# Altium PCB Arduino MEGA blank shield.pcbdoc
Units mil, origin at the board's own origin, x right, y up, seen from the top; angles counter-clockwise.
Board outline 3210 x 3300 mil, 2 copper layers (Top Layer, Bottom Layer); 29 components, 85 nets, 185 pads, 12 vias.
Unrouted connection lines stored in the file: 4.
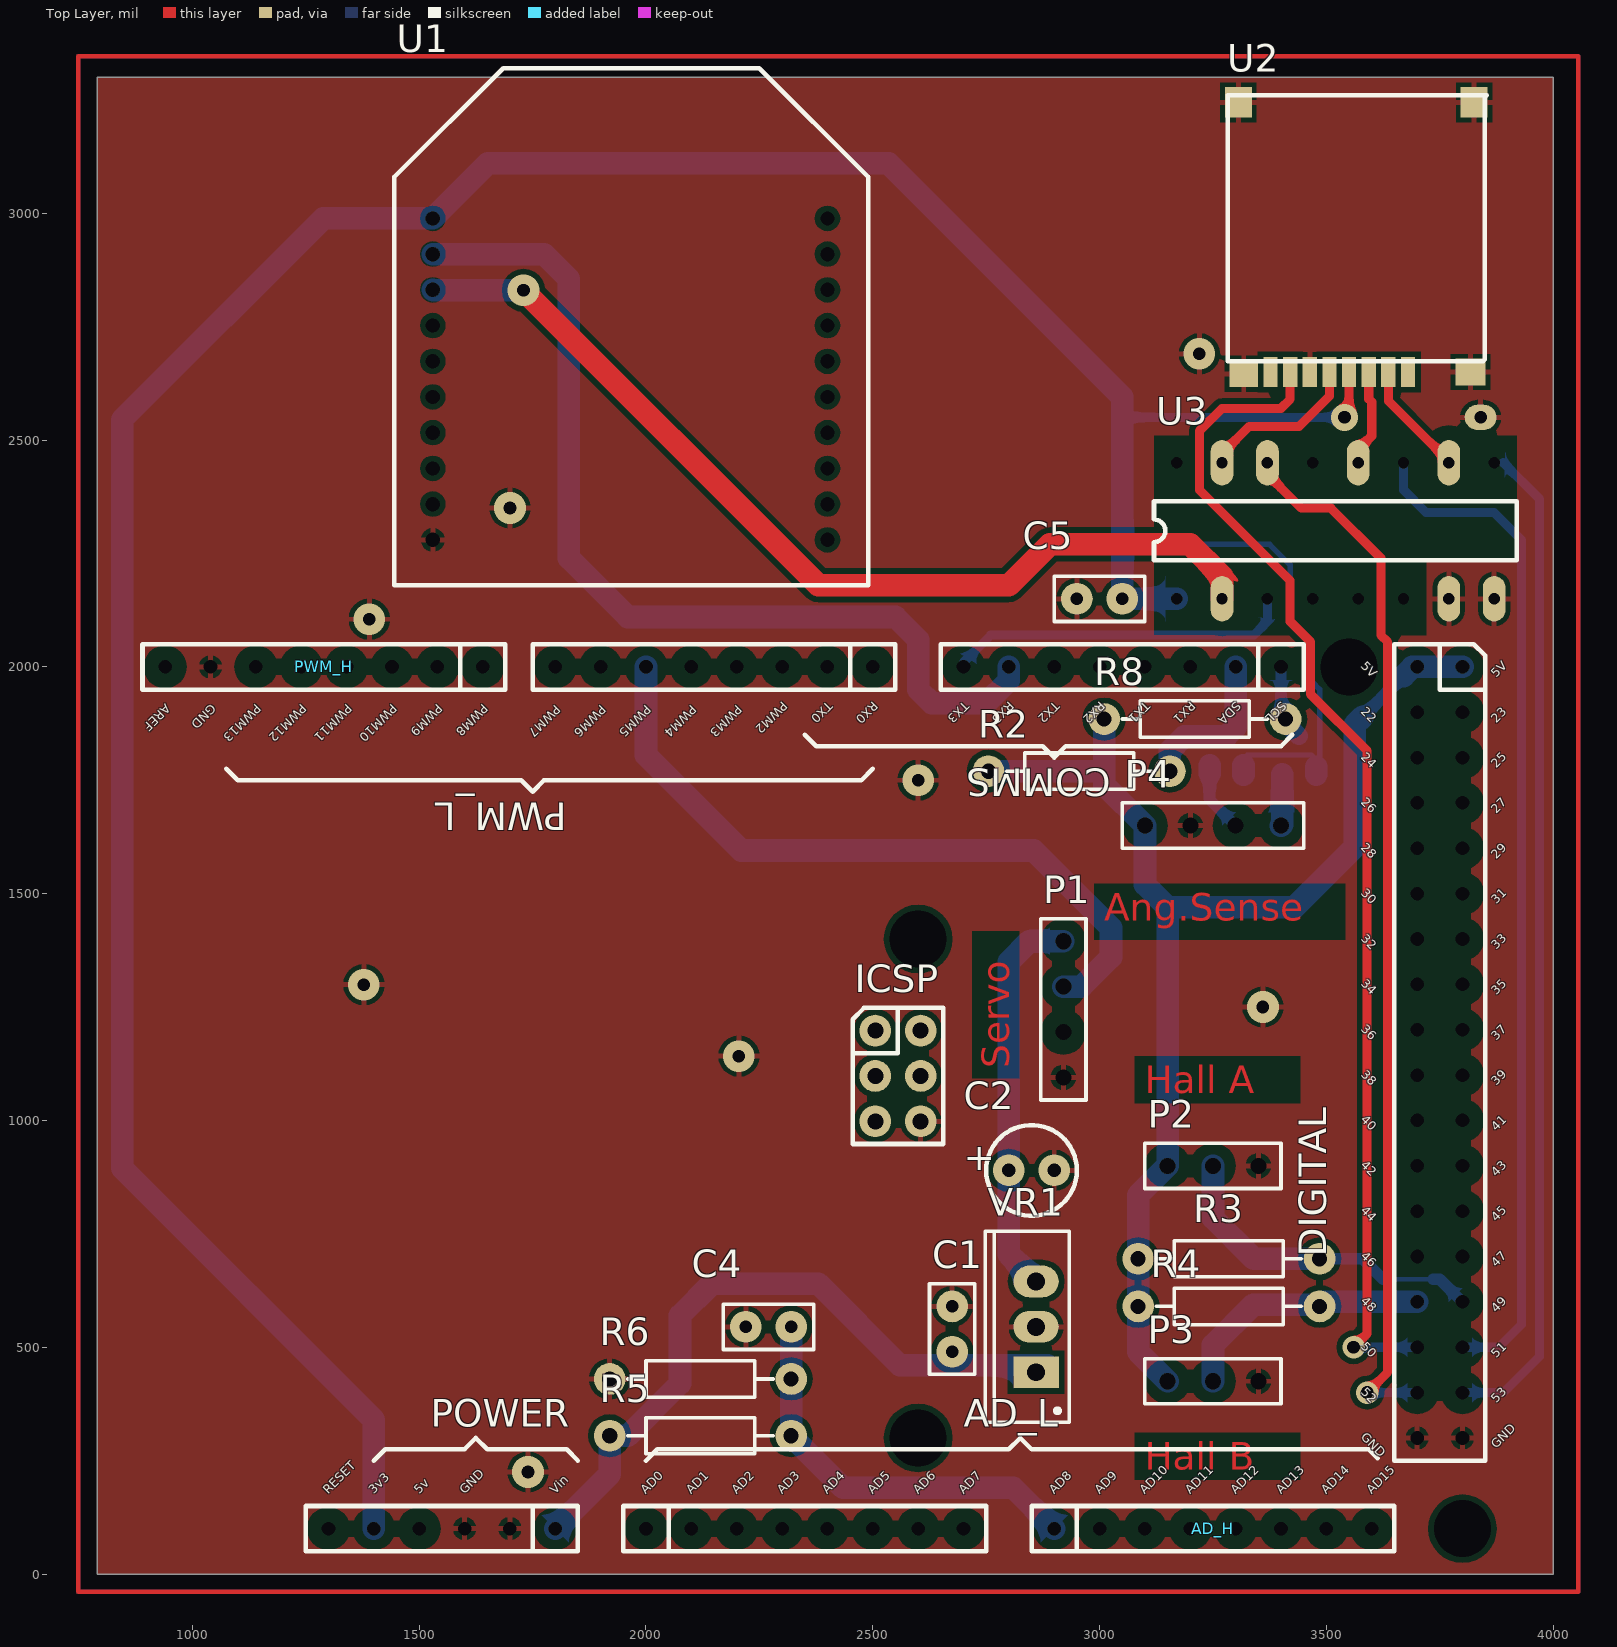
[diagram p0: Top Layer view]
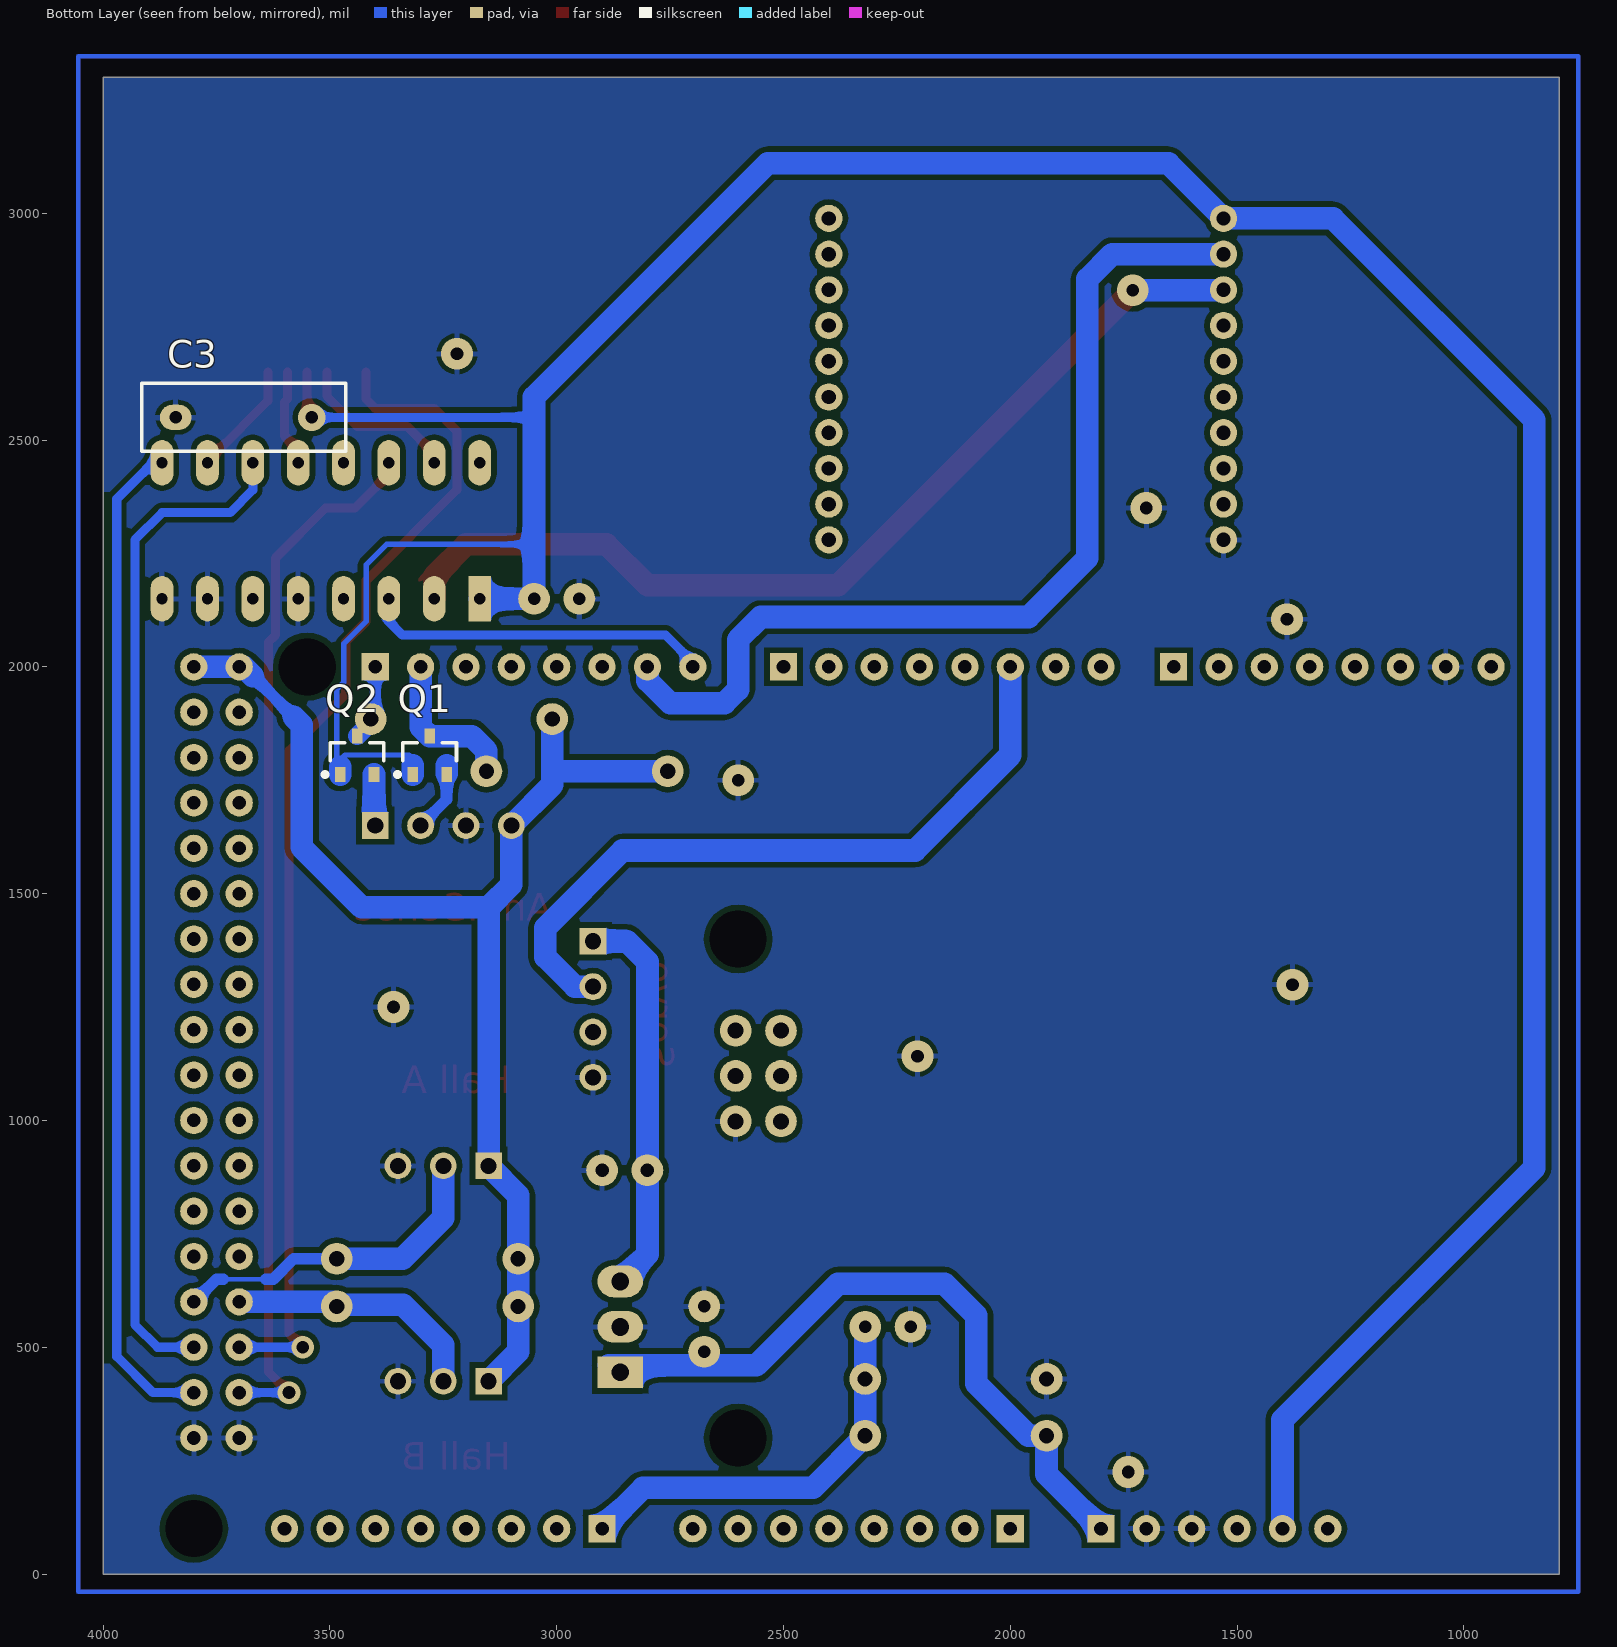
[diagram p1: Bottom Layer view, seen from below]

## Layer stack, top to bottom
Top Solder: solder mask 0.4, Solder Resist, Dk 3.5
Top Layer: signal copper 1.4
Dielectric1: dielectric 12.6, FR-4, Dk 4.8
Bottom Layer: signal copper 1.4
Bottom Solder: solder mask 0.4, Solder Resist, Dk 3.5

## Board outline
4000,0 4000,3300 2500,3300 790,3300 790,0

## Design rules (kind name [scope] priority, off if disabled: settings)
Clearance Clearance_2 [(InComponent('P1') OR InComponent('P2') OR InComponent('P3') OR InComponent('P4') OR InComponent('AD_H') OR InComponent('AD_L') OR InComponent('COMMS') OR InComponent('DIGITAL') OR InComponent('POWER') OR InComponent('PWM_H') OR InComponent('PWM_L') OR InComponent('U3')) vs (InNet('GND') AND OnLayer('Top Layer'))] p1: gap=32
Clearance [All] p2: gap=12
PolygonConnect [All] p1: connectstyle=Relief reliefconductorwidth=12 reliefentries=4 polygonreliefangle="90 Angle" airgapwidth=10
RoutingVias [All] p1: holewidth=28 width=50 viastyle="Through Hole" minholewidth=28 minwidth=50 maxholewidth=28 maxwidth=50
SilkToSolderMaskClearance SilkscreenOverComponentPads [IsPad] p1: minsilkscreentomaskgap=10 clearancetoexposedcopper=TRUE
SolderMaskExpansion [All] p1: expansion=4
Width [All] p1: maxlimit=100 minlimit=10 preferedwidth=50
29 further rules are at their usual default settings.

## Components (designator, comment, footprint, x,y, rotation, side; value= is the part's Value field where it differs from the comment)
AD_H "AD_H" "Header 8x1 8.5mm" 2900,100 r0 top locked
AD_L "AD_L" "Header 8x1 8.5mm" 2000,100 r0 top locked
C1 "Cap" RAD-0.1 2675,540 r270 top
C2 "Cap Pol2" cap5mm 2850,890 r0 top
C3 "Cap" RAD-0.3 3690,2550 r180 bottom
C4 "Cap" RAD-0.1 2270,545 r0 top
C5 "Cap" RAD-0.1 3000,2150 r0 top
COMMS "Communication" "Header 8x1 8.5mm" 3400,2000 r180 top
DIGITAL "IO_36" "HEADER 36X 8MM" 3800,2000 r270 top locked
ICSP "ICSP" ICSP 2505.51,1198.03 r0 top locked
P1 "Servo" HDR1X4 2920,1395 r270 top
P2 "Hall A" HDR1X3 3150,900 r0 top
P3 "Hall B" HDR1X3 3150,425 r0 top
P4 "Ang sensors" HDR1X4 3400,1650 r180 top
POWER "POWER" "Header 6x1 8.5mm" 1800,100 r180 top locked
PWM_H "PWM_H" "Header 8x1 8.5mm" 1640,2000 r180 top locked
PWM_L "PWM_L" "Header 8x1 8.5mm" 2500,2000 r180 top locked
Q1 "NMOS-2" SOT-23_L 3280,1805 r90 bottom
Q2 "NMOS-2" SOT-23_L 3440,1805 r90 bottom
R2 "Res1" AXIAL-0.4 2955,1770 r180 top
R3 "Res1" axial-0.4 3285,695 r0 top
R4 "Res1" axial-0.4 3285,590 r0 top
R5 "Res1" AXIAL-0.4 2120,305 r180 top
R6 "Res1" AXIAL-0.4 2120,430 r0 top
R8 "Res1" AXIAL-0.4 3210,1885 r180 top
U1 "XBee" PCBComponent_1 1530,2280 r0 top
U2 "" microsd 3680,2650 r0 top
U3 "CD4050" "DIP16 - duplicate" 3170,2150 r90 top
VR1 "7805" TO-220AB 2860,545 r90 top

## Footprints (in the part's own frame and the unit in brackets; to place one, negate y for a bottom-side part, rotate by r counter-clockwise, add the part's x,y. Pads: shape width x height; smd on the part's side, far side on the other; paste and mask are expansions set on the pad)
AXIAL-0.4 [mil] "Axial Device, Thru-Hole; 2 Leads; 0.4 in Pin Spacing"
  round 70 hole 33.46: 1(-200,0) 2(200,0)
  silkscreen extent -160,-40 160,40
axial-0.4 [mil] "Axial Device, Thru-Hole; 2 Leads; 0.4 in Pin Spacing"
  round 70 hole 33.46: 1(-200,0) 2(200,0)
  silkscreen extent -160,-40 160,40
cap5mm [mil]
  round 70 hole 30: +(-50,0) -(50,0)
  silkscreen extent -100,-100 100,100
"DIP16 - duplicate" [mil]
  rect 0x0 / inner rect 100x50 / far side rect 100x50 hole 25: 1(0,0)
  oval 100x50 hole 25: 2(0,-100) 7(0,-600) 8(0,-700) 10(300,-600) 12(300,-400) 14(300,-200) 15(300,-100)
  round 0 / inner oval 100x50 / far side oval 100x50 hole 25: 3(0,-200) 4(0,-300) 5(0,-400) 6(0,-500) 9(300,-700) 11(300,-500) 13(300,-300) 16(300,0)
  silkscreen extent 85,-750 215,50
HDR1X3 [mm] "Connector; Header; 3 Position"
  rect 0x0 / inner rect 1.5x1.5 / far side rect 1.5x1.5 hole 0.9: 1(0,0)
  round 0 / inner round 1.5 / far side round 1.5 hole 0.9: 2(2.54,0) 3(5.08,0)
  silkscreen extent -1.27,-1.27 6.35,1.27
HDR1X4 [mm] "Connector; Header; 4 Position"
  rect 0x0 / inner rect 1.5x1.5 / far side rect 1.5x1.5 hole 0.9: 1(0,0)
  round 0 / inner round 1.5 / far side round 1.5 hole 0.9: 2(2.54,0) 3(5.08,0) 4(7.62,0)
  silkscreen extent -1.27,-1.27 8.89,1.27
"Header 6x1 8.5mm" [mil] "Stackable 6 pin header"
  rect 0x0 / inner rect 60x60 / far side rect 60x60 hole 30: 1(0,0)
  round 0 / inner round 60 / far side round 60 hole 30: 2(100,0) 3(200,0) 4(300,0) 5(400,0) 6(500,0)
  silkscreen extent -50,-50 550,50, body extent -50,-50 550,50, height 335
"Header 8x1 8.5mm" [mil] "Stackable 8 pin header"
  rect 0x0 / inner rect 60x60 / far side rect 60x60 hole 30: 1(0,0)
  round 0 / inner round 60 / far side round 60 hole 30: 2(100,0) 3(200,0) 4(300,0) 5(400,0) 6(500,0) 7(600,0) 8(700,0)
  silkscreen extent -50,-50 750,50, body extent -50,-50 750,50, height 335
"HEADER 36X 8MM" [mil] "Stackable 10 pin header"
  round 0 / inner round 60 / far side round 60 hole 30: 1(0,0) 2(0,-100) 3(100,0) 4(100,-100) 5(200,0) 6(200,-100) 7(300,0) 8(300,-100) 9(400,0) 10(400,-100) 11(500,0) 12(500,-100) 13(600,0) 14(600,-100) 15(700,0) 16(700,-100) 17(800,0) 18(800,-100) 19(900,-100) 20(900,0) 21(1000,0) 22(1000,-100) 23(1100,0) 24(1100,-100) 25(1200,0) 26(1200,-100) 27(1300,0) 28(1300,-100) 29(1400,0) 30(1400,-100) 31(1500,0) 32(1500,-100) 33(1600,0) 34(1600,-100) 35(1700,0) 36(1700,-100)
  silkscreen extent -50,-150 1750,50, body extent -50,-150 1750,50, height 335
ICSP [mil]
  round 70 hole 35.43: 1(0,0) 2(100,0) 3(0,-100) 4(100,-100) 5(0,-200) 6(100,-200)
  silkscreen extent -50,-250 150,50, body extent -50,-250 150,50, height 485
microsd [mm]
  rect 0.8x1.68 smd: 1(0,0) 2(-1.1,0) 3(-2.2,0) 4(-3.3,0) 5(-4.4,0) 6(-5.5,0) 7(-6.6,0) 8(-7.7,0)
  rect 1.6x1.5 smd: G1(-9.2,-0.1)
  rect 1.7x1.5 smd: G2(3.5,0)
  rect 1.5x1.7 smd: G3(3.7,15.1) G4(-9.5,15.1)
  silkscreen extent -10.1,0.6 4.4,15.5, body extent -10.05,-0.5 4.25,15.5, height 1.73
PCBComponent_1 [mm]
  round 0 / inner round 1.524 / far side round 1.524 hole 0.8: 1(0,18) 2(0,16) 3(0,14) 4(0,12) 5(0,10) 6(0,8) 7(0,6) 8(0,4) 9(0,2) 10(0,0) 11(22.098,0) 12(22.098,2) 13(22.098,4) 14(22.098,6) 15(22.098,8) 16(22.098,10) 17(22.098,12) 18(22.098,14) 19(22.098,16) 20(22.098,18)
  silkscreen extent -2.16,-2.54 24.38,26.42
RAD-0.1 [mil] "Radial Cap, Thru-Hole; 2 Leads; 0.1 in Pin Spacing"
  round 70 hole 27.56: 1(-50,0) 2(50,0)
  silkscreen extent -100,-50 100,50
RAD-0.3 [mm] "Radial Cap, Thru-Hole; 2 Leads; 0.3 in Pin Spacing"
  oval 1.778x1.422 hole 0.7: 1(-3.81,0)
  round 1.2 hole 0.7: 2(3.81,0)
  silkscreen extent -5.71,-1.91 5.71,1.91
SOT-23_L [mm] "SOT23, 3-Leads, Body 2.9x1.3mm, Pitch 0.95mm, Lead Span 2.5mm, IPC High Density"
  rect 0.85x0.6 smd: 1(-1.075,0.95) 2(-1.075,-0.95) 3(1.075,0)
  silkscreen extent -1.2,-1.5 0.7,1.93, body extent -0.7,-1.5 0.7,1.5, height 1.1
TO-220AB [mil] "TO, Thru-Hole, Vertical, Heatsink Mounted; 3 In-Line Leads; Pitch 2.54 mm"
  rect 70x100 hole 39.37: 1(-100,0)
  oval 70x100 hole 39.37: 2(0,0) 3(100,0)
  silkscreen extent -211,-73 211,112, body extent -213,-75 213,114, height 760

## Part data
C1 C3 C4 C5: "Capacitor"
C2: "Polarized Capacitor (Axial)"
P1 P4: library part "Header 4", "Header, 4-Pin"
P2 P3: library part "Header 3", "Header, 3-Pin"
Q1 Q2: "N-Channel Power MOSFET"
R2 R3 R4 R5 R6 R8: "Resistor"
U2: library part Component_1
VR1: library part "Volt Reg", "Voltage Regulator"

## Free pads (board coordinates)
  round 62.99 hole 125.98: 0(2600,300) 0(2600,1400) 0(3550,2000) 0(3800,100)

## Via types
v1: diameter 70, hole 28, Top Layer to Bottom Layer, 9 vias
v2: diameter 50, hole 28, Top Layer to Bottom Layer, 2 vias
v3: diameter 60, hole 28, Top Layer to Bottom Layer, 1 vias

## Nets (pads, with @x,y where several pads share a name; then routed paths per layer and width w, separated by ;. In a path a pad name is that pad's centre, name@x,y a point inside that pad or via, vN(x,y) a via of type N, cw(c..) or ccw(c..) an arc to the next point about the centre after c; other vN are vias at no path point)
3V3: C3.2 C5.2 POWER.5 Q1.1 Q2.1 U1.1 U2.4 U3.1 | length 7612.9
  Top Layer w20: v3(3540,2550) 3550,2550 3550.08,2550.08 U2.4
  Bottom Layer w12: 3050,2270 3375,2270 3420,2225 3420,2100 3469.01,2050.99 3469.01,1966.45 3485,1950.46 3485,1770.28 Q2.1 ; Q1.1 3317.4,1797.4 3325.68,1805.68 3466.72,1805.68 3477.4,1795
  Bottom Layer w20: 3050,2550 v3(3540,2550)
  Bottom Layer w50: POWER.5 1400,340 845,895 845,2545 1288.66,2988.66 U1.1 1651.34,3110 2535,3110 3050,2595 3050,2550 3050,2270 C5.2 U3.1 ; Q1.1 3317.4,1782.4 ; Q2.1 3477.4,1780
5V: DIGITAL.1 DIGITAL.2 ICSP.2 P2.1 P3.1 P4.4 POWER.4 R2.2 R3.1 R4.1 R8.2 | length 2856.6
  Bottom Layer w25: 3580,1890 3670,1980
  Bottom Layer w50: R2.2 3005,1770 3010,1775 ; R8.2 3010,1775 ; P3.1 3085,490 R4.1 R3.1 3085,835 P2.1 3150,1470 ; 3580,1890 3562.32,1872.32 3562.32,1602.32 3430,1470 3150,1470 ; 3670,1980 3690,2000 DIGITAL.2 DIGITAL.1 ; 3010,1775 3010,1740 P4.4 3100,1520 3150,1470
AD0: AD_L.1
AD1: AD_L.2
AD2: AD_L.3
AD3: AD_L.4
AD4: AD_L.5
AD5: AD_L.6
AD6: AD_L.7
AD7: AD_L.8
AD8: AD_H.1 C4.2 R5.1 R6.2 | length 904.9
  Bottom Layer w50: C4.2 R6.2 R5.1 2435,190 2810,190 AD_H.1
AD9: AD_H.2
AD10: AD_H.3
AD11: AD_H.4
AD12: AD_H.5
AD13: AD_H.6
AD14: AD_H.7
AREF: PWM_H.8
GND: C1.1 C2.- C3.1 C4.1 C5.1 DIGITAL.35 DIGITAL.36 ICSP.6 P1.4 P2.3 P3.3 P4.3 POWER.2 POWER.3 PWM_H.7 R6.1 U1.10 U2.6 U2.G1 U2.G2 U2.G3 U2.G4 U3.5 U3.7 U3.8 VR1.2 | length 13385.8
  Top Layer w10: 748.03,-39.37 748.03,3346.46 4055.12,3346.46 4055.12,-39.37 748.03,-39.37
  other v1: 1740,225 2204.72,1141.73 3360,1250 1377.95,1299.21 2600,1750 1390,2105 1700,2350 3220,2690
HALLA: DIGITAL.29 P2.2 R3.2 | length 741.6
  Bottom Layer w10: 3641.34,650 3735,650
  Bottom Layer w25: R3.2 3580,695 3625,650 3641.34,650 ; 3735,650 3750,650 DIGITAL.29
  Bottom Layer w50: P2.2 3250,785 3340,695 R3.2
HALLB: DIGITAL.30 P3.2 R4.2 | length 569.4
  Bottom Layer w50: P3.2 3250,505 3338.71,593.71 3488.71,593.71 3495,600 DIGITAL.30
IO22: DIGITAL.3
IO23: DIGITAL.4
IO24: DIGITAL.5
IO25: DIGITAL.6
IO26: DIGITAL.7
IO27: DIGITAL.8
IO28: DIGITAL.9
IO29: DIGITAL.10
IO30: DIGITAL.11
IO31: DIGITAL.12
IO32: DIGITAL.13
IO33: DIGITAL.14
IO34: DIGITAL.15
IO35: DIGITAL.16
IO36: DIGITAL.17
IO37: DIGITAL.18
IO38: DIGITAL.19
IO39: DIGITAL.20
IO40: DIGITAL.21
IO41: DIGITAL.22
IO42: DIGITAL.23
IO43: DIGITAL.24
IO44: DIGITAL.25
IO45: DIGITAL.26
IO46: DIGITAL.27
IO47: DIGITAL.28
IO50: DIGITAL.32 U2.7 | length 2614.7
  Top Layer w20: U2.7 3420.16,2590.16 3400,2570 3270,2570 3220,2520 3220,2390 3420,2190 3420,2100 3465.01,2054.99 3465.01,1940 3590,1815.01 3590,530 v2(3560,500)
  Bottom Layer w20: v2(3560,500) DIGITAL.32
IO51: DIGITAL.31 U3.11 | length 2246.3
  Bottom Layer w20: U3.11 3670,2390 3720,2340 3870,2340 3930,2280 3930,550 3880,500 DIGITAL.31
IO52: DIGITAL.34 U3.14 | length 2326.5
  Top Layer w20: U3.14 3370,2425 3445,2350 3510,2350 3620,2240 3620,2070 3634.99,2055.01 3634.99,444.99 v2(3590,400)
  Bottom Layer w20: v2(3590,400) DIGITAL.34
IO53: DIGITAL.33 U3.9 | length 2206.3
  Bottom Layer w20: DIGITAL.33 3890,400 3970,480 3970,2370 U3.9@3890,2450
M1PWM: PWM_H.2
M2PWM: PWM_H.3
MISO: ICSP.1
MOSI: ICSP.4
NetC2_1: C2.+ P1.1 VR1.3 | length 868.5
  Bottom Layer w50: VR1.3 2800,705 C2.+ 2800,1350 2845,1395 P1.1
NetP4_1: P4.1 Q2.2 | length 113.8
  Bottom Layer w50: P4.1 3402.6,1652.6 Q2.2
NetP4_2: P4.2 Q1.2 | length 156.5
  Bottom Layer w25: Q1.2@3242.6,1765 3242.6,1707.4 P4.2
  Bottom Layer w50: Q1.2@3242.6,1765 3242.6,1782.68
NetU1_3: U1.3 U3.2 | length 2126
  Top Layer w50: v1(1730,2830) 2380,2180 2800,2180 2890,2270 3200,2270 3270,2200 U3.2
  Bottom Layer w50: U1.3 1531.18,2830 v1(1730,2830)
NetU2_2: U2.2 U3.10 | length 245.2
  Top Layer w20: U2.2 3636.69,2586.31 3753,2470 U3.10@3770,2470
NetU2_3: U2.3 U3.12 | length 198.1
  Top Layer w20: U3.12@3575,2465 3575,2484.15 3600,2509.15 3600,2584 3593.39,2590.61 U2.3
NetU2_5: U2.5 U3.15 | length 342.5
  Top Layer w20: U3.15@3270,2470 3330,2530 3440,2530 3506.77,2596.77 U2.5
PWM2: PWM_L.3
PWM3: PWM_L.4
PWM4: PWM_L.5
PWM5: P1.2 PWM_L.6 | length 1574.3
  Bottom Layer w50: PWM_L.6 2000,1805 2210,1595 2855,1595 3025,1425 3025,1360 2960,1295 P1.2
PWM6: PWM_L.7
PWM7: PWM_L.8
PWM8: PWM_H.1
PWM11: PWM_H.4
PWM12: PWM_H.5
PWM13: PWM_H.6
RESET: ICSP.5 POWER.6
RX0: PWM_L.1
RX1: COMMS.3
RX2: COMMS.5
RX3: COMMS.7 U1.2 | length 2155.4
  Bottom Layer w50: U1.2 1775.08,2909.92 1830,2855 1830,2240 1960,2110 2550,2110 2600,2060 2600,1950 2630,1920 2750,1920 2800,1970 COMMS.7
SCK: ICSP.3
SCL: COMMS.1 Q2.3 R8.1 | length 169.2
  Bottom Layer w25: R8.1@3400,1887.32 COMMS.1
  Bottom Layer w40: R8.1@3400,1887.32 Q2.3
SDA: COMMS.2 Q1.3 R2.1 | length 344.3
  Bottom Layer w50: R2.1 3155,1815 3187.32,1847.32 Q1.3 3300,1867.32 COMMS.2
TX0: PWM_L.2
TX1: COMMS.4
TX2: COMMS.6
TX3: COMMS.8 U3.3 | length 767.3
  Bottom Layer w20: COMMS.8 2700,2010 2760,2070 3340,2070 3370,2100 U3.3
VBAT: C1.2 POWER.1 R5.2 VR1.1 | length 1520.9
  Bottom Layer w50: POWER.1 1920,220 R5.2 1960,305 2075,420 2075,570 2145,640 2380,640 2560,460 VR1.1@2885,460
pads on no net: AD_H.8 P1.3 U1.4 U1.5 U1.6 U1.7 U1.8 U1.9 U1.11 U1.12 U1.13 U1.14 U1.15 U1.16 U1.17 U1.18 U1.19 U1.20 U2.1 U2.8 U3.4 U3.6 U3.13 U3.16
copper on no net: | length 13385.8
  Bottom Layer w10: 748.03,-39.37 4055.12,-39.37 4055.12,3346.46 748.03,3346.46 748.03,-39.37

## Polygon pours and split planes (outlines as drawn)
GND on Top Layer "Top Gnd" (solid, remove dead copper, pour order 0): 4000,0 4000,3300 2500,3300 790,3300 790,0
GND on Bottom Layer "Buttom GND" (solid, remove dead copper, pour order 1): 4000,0 4000,3300 2500,3300 790,3300 790,0

## Other copper
Top Layer:
  pour cut-out: 3120,2510 3920,2510 3920,2240 3120,2240
  pour cut-out: 3720,2070 3719.62,2069.62 3120,2070.44 3120,2285 3720,2285
  text "Ang.Sense" at 3010,1440 h60
  text "Servo" at 2801.28,1115 h60 r90
  text "Hall A" at 3100,1060 h60
  text "Hall B" at 3100,230 h60

## Silkscreen, mask and mechanical layers (free items; w line width, h text height)
Top Overlay:
  lines w10: 1075,1775 1100,1750 1725,1750 1750,1725 1775,1750 2475,1750 2500,1775 ; 1400,250 1425,275 1600,275 1625,300 1650,275 1825,275 1850,250 ; 2000,250 2025,275 2800,275 2825,300 2850,275 3592.93,275 3612.7,255.23 ; 2350,1850 2375,1825 2875,1825 2900,1800 2925,1825 3400,1825 3425,1850
  text "5V" at 3575,2000 h20 r315
  text "5V" at 3875,1975 h20 r45
  text "PWM2" at 2300,1925 h20 r225
  text "TX0" at 2400,1925 h20 r225
  text "RX0" at 2500,1925 h20 r225
  text "TX3" at 2700,1925 h20 r225
  text "RX3" at 2800,1925 h20 r225
  text "TX2" at 2900,1925 h20 r225
  text "RX2" at 3000,1925 h20 r225
  text "TX1" at 3100,1925 h20 r225
  text "RX1" at 3200,1925 h20 r225
  text "SDA" at 3300,1925 h20 r225
  text "SCL" at 3400,1925 h20 r225
  text "AREF" at 940,1920 h20 r225
  text "GND" at 1040,1920 h20 r225
  text "PWM13" at 1140,1920 h20 r225
  text "PWM12" at 1240,1920 h20 r225
  text "PWM11" at 1340,1920 h20 r225
  text "PWM10" at 1440,1920 h20 r225
  text "PWM9" at 1540,1920 h20 r225
  text "PWM8" at 1640,1920 h20 r225
  text "PWM7" at 1800,1917.93 h20 r225
  text "PWM6" at 1900,1917.93 h20 r225
  text "PWM5" at 2000,1917.93 h20 r225
  text "PWM4" at 2100,1917.93 h20 r225
  text "PWM3" at 2200,1917.93 h20 r225
  text "22" at 3575,1900 h20 r315
  text "23" at 3875,1875 h20 r45
  text "24" at 3575,1800 h20 r315
  text "25" at 3875,1775 h20 r45
  text "26" at 3575,1700 h20 r315
  text "27" at 3875,1675 h20 r45
  text "28" at 3575,1600 h20 r315
  text "29" at 3875,1575 h20 r45
  text "30" at 3575,1500 h20 r315
  text "31" at 3875,1475 h20 r45
  text "32" at 3575,1400 h20 r315
  text "33" at 3875,1375 h20 r45
  text "34" at 3575,1300 h20 r315
  text "35" at 3875,1275 h20 r45
  text "36" at 3575,1200 h20 r315
  text "37" at 3875,1175 h20 r45
  text "38" at 3575,1100 h20 r315
  text "39" at 3875,1075 h20 r45
  text "40" at 3575,1000 h20 r315
  text "41" at 3875,975 h20 r45
  text "42" at 3575,900 h20 r315
  text "43" at 3875,875 h20 r45
  text "44" at 3575,800 h20 r315
  text "45" at 3875,775 h20 r45
  text "46" at 3575,700 h20 r315
  text "47" at 3875,675 h20 r45
  text "48" at 3575,600 h20 r315
  text "49" at 3875,575 h20 r45
  text "50" at 3575,500 h20 r315
  text "51" at 3875,475 h20 r45
  text "52" at 3575,400 h20 r315
  text "53" at 3875,375 h20 r45
  text "GND" at 3575,300 h20 r315
  text "GND" at 3875,275 h20 r45
  text "RESET" at 1300,175 h20 r45
  text "3v3" at 1400,175 h20 r45
  text "5v" at 1500,175 h20 r45
  text "GND" at 1600,175 h20 r45
  text "Vin" at 1800,175 h20 r45
  text "AD0" at 2000,175 h20 r45
  text "AD1" at 2100,175 h20 r45
  text "AD2" at 2200,175 h20 r45
  text "AD3" at 2300,175 h20 r45
  text "AD4" at 2400,175 h20 r45
  text "AD5" at 2500,175 h20 r45
  text "AD6" at 2600,175 h20 r45
  text "AD7" at 2700,175 h20 r45
  text "AD8" at 2900,175 h20 r45
  text "AD9" at 3000,175 h20 r45
  text "AD10" at 3100,175 h20 r45
  text "AD11" at 3200,175 h20 r45
  text "AD12" at 3300,175 h20 r45
  text "AD13" at 3400,175 h20 r45
  text "AD14" at 3500,175 h20 r45
  text "AD15" at 3600,175 h20 r45
Mechanical 1:
  circle w5: c2600,300 r62.99
  circle w5: c2600,1400 r62.99
  circle w5: c3550,2000 r62.99
  circle w5: c3800,100 r62.99
  lines w5: 850,-5 850,520 850,1570 850,2095

## Text inside footprints (layer, text, board x,y; h text height)
C2: Top Overlay "+" at 2700,890 h60